# EAGLE board Roboduino TQFP-SMD (EAGLE 5.07)
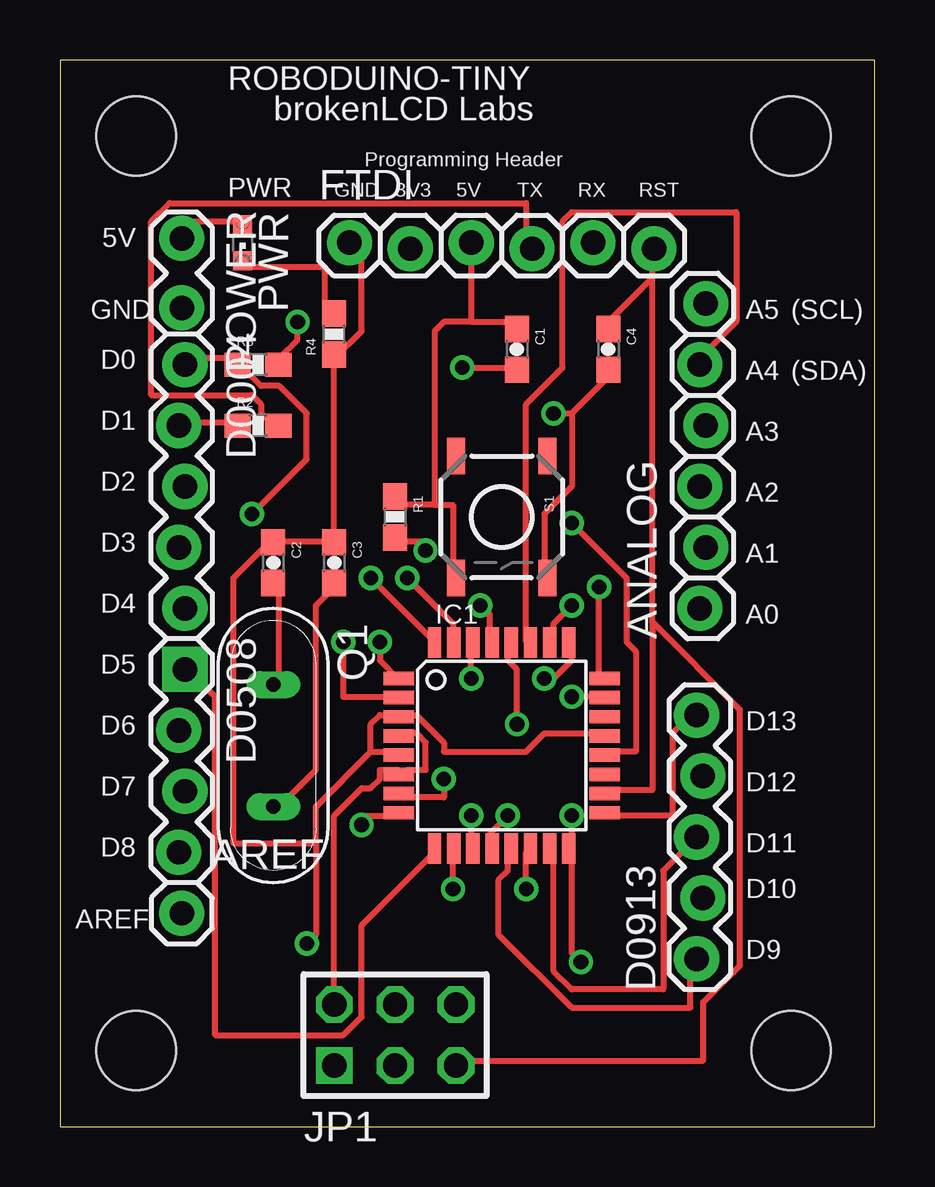
[diagram p0: board, top side]
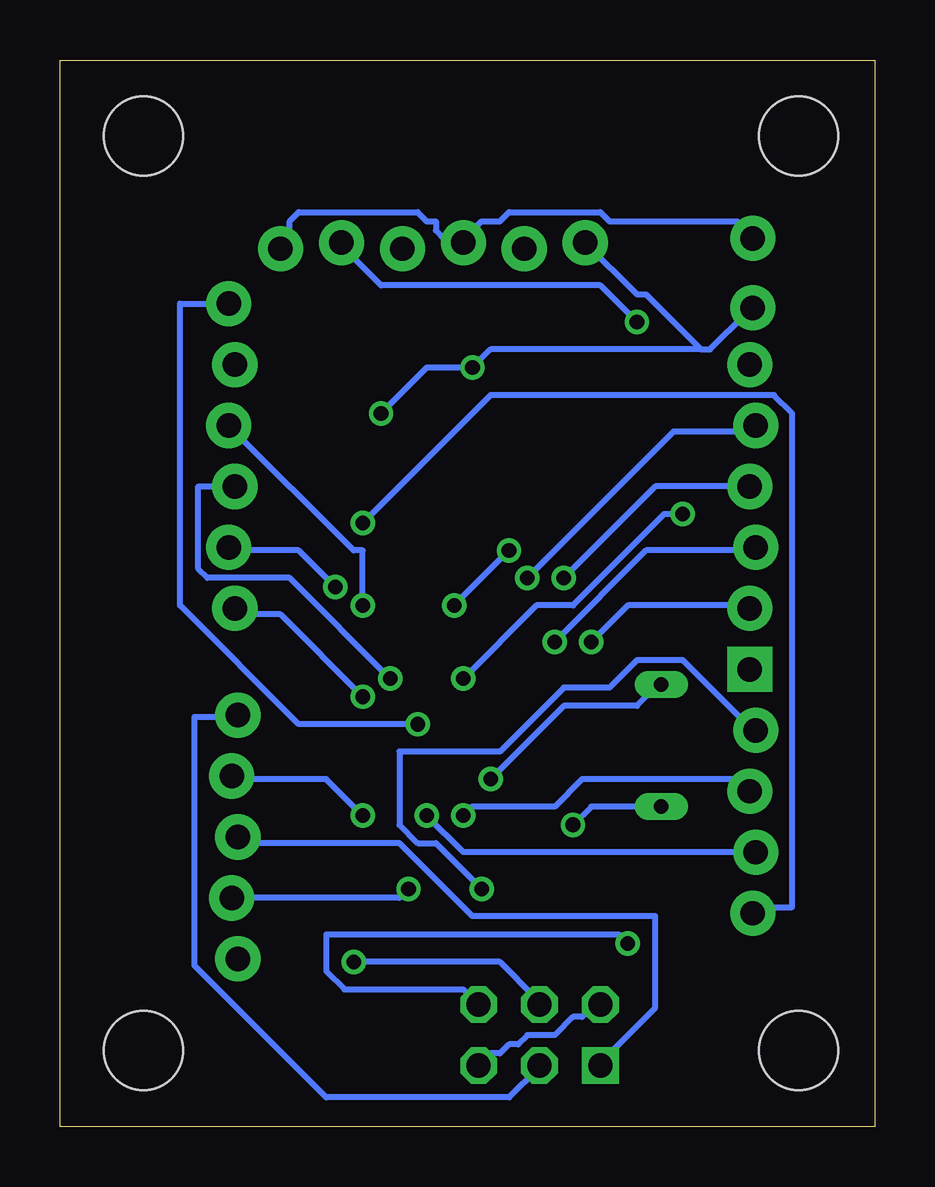
[diagram p1: board, bottom side, seen from below]

Size 33.96 x 44.44 mm. Coordinates in mm from the lower left corner, seen from the top.
Outline: 0,0 33.96,0 33.96,44.44 0,44.44 0,0
Copper layers (1*16): Top 0.035mm / dielectric 1.5mm / Bottom 0.035mm
Design rules "default": minimum track width 10mil, minimum drill 24mil, track to track 8mil, track to pad 8mil, pad to pad 8mil, via to via 8mil, smd to smd 8mil, copper to edge 40mil, drill to drill 8mil, minimum pad ring 10mil, minimum via ring 8mil, stop-mask expansion 4mil, vias tented up to drill 0mil, thermal gap 10mil

## Footprints (pad centres in the part's own frame; a part is rotated, then mirrored left to right if it is on the bottom)
1X06_LOCK = drill 1.016 pad 1.88 round: 1 0,0; 2 2.54,-0.254; 3 5.08,0; 4 7.62,-0.254; 5 10.16,0; 6 12.7,-0.254
1X01 = drill 1.016 pad 1.88 round: 1 0,0
0603-CAP = smd 1.1 x 1: 1 -0.85,0; 2 0.85,0
1X05_LOCK = drill 1.016 pad 1.88 round: 1 0,0.127; 2 2.54,-0.127; 3 5.08,0.127; 4 7.62,-0.127; 5 10.16,0.127
1X04_LOCK = drill 1.016 pad 1.88 square: 1 0,0.127 | drill 1.016 pad 1.88 round: 2 2.54,-0.127; 3 5.08,0.127; 4 7.62,-0.127
TQFP32-08 = smd 1.27 x 0.559: 1 -4.293,2.8; 2 -4.293,2; 3 -4.293,1.2; 4 -4.293,0.4; 5 -4.293,-0.4; 6 -4.293,-1.2; 7 -4.293,-2; 8 -4.293,-2.8; 17 4.293,-2.8; 18 4.293,-2; 19 4.293,-1.2; 20 4.293,-0.4; 21 4.293,0.4; 22 4.293,1.2; 23 4.293,2; 24 4.293,2.8 | smd 0.559 x 1.27: 9 -2.8,-4.293; 10 -2,-4.293; 11 -1.2,-4.293; 12 -0.4,-4.293; 13 0.4,-4.293; 14 1.2,-4.293; 15 2,-4.293; 16 2.8,-4.293; 25 2.8,4.293; 26 2,4.293; 27 1.2,4.293; 28 0.4,4.293; 29 -0.4,4.293; 30 -1.2,4.293; 31 -2,4.293; 32 -2.8,4.293
AVR-ISP-6 = drill 1.016 square: 1 -2.54,-1.27 | drill 1.016 octagon: 2 -2.54,1.27; 3 0,-1.27; 4 0,1.27; 5 2.54,-1.27; 6 2.54,1.27
1X02_LOCK = drill 1.016 pad 1.88 round: 1 -0.178,0; 2 2.718,0
CHIPLED_0603 = smd 0.8 x 0.8: A 0,-0.75; C 0,0.75
QS = drill 0.61 long: 1 -2.54,0; 2 2.54,0
0603-RES = smd 1.1 x 1: 1 -0.85,0; 2 0.85,0
TACTILE_SWITCH_SMD = smd 1.524 x 0.762: 1 -2.54,1.905; 2 2.54,1.905; 3 -2.54,-1.905; 4 2.54,-1.905
STANDOFF = hole 3.302: 0,0

## Placement (x,y rotation side)
ANALOG  [1X06_LOCK]  26.67,21.59 90 top
AREF  M01PTH  [1X01]  5.08,8.89 0 top
C1  100nF  [0603-CAP]  19.05,32.38 270 top
C2  22pF  [0603-CAP]  8.89,23.5 270 top
C3  22pF  [0603-CAP]  11.43,23.5 270 top
C4  100nF  [0603-CAP]  22.86,32.38 270 top
D0004  [1X05_LOCK]  5.08,31.75 270 top
D0508  [1X04_LOCK]  5.08,19.05 270 top
D0913  [1X05_LOCK]  26.67,6.99 90 top
FTDI  [1X06_LOCK]  12.06,36.83 0 top
IC1  MEGA8-AI  [TQFP32-08]  18.41,15.88 0 top
JP1  AVR-ISP-6  [AVR-ISP-6]  13.97,3.81 0 top
POWER  [1X02_LOCK]  5.08,36.83 270 top
PWR  [CHIPLED_0603]  7.62,36.83 180 top
Q1  16MHz  [QS]  8.89,15.88 270 top
R1  10K  [0603-RES]  13.97,25.4 270 top
R2  1K  [0603-RES]  8.26,29.21 0 top
R3  1K  [0603-RES]  8.26,31.75 0 top
R4  1K  [0603-RES]  11.43,33.02 90 top
S1  [TACTILE_SWITCH_SMD]  18.41,25.4 270 top
U$1  STANDOFF  [STANDOFF]  3.17,3.17 0 top
U$2  STANDOFF  [STANDOFF]  30.48,3.17 0 top
U$3  STANDOFF  [STANDOFF]  3.17,41.27 0 top
U$4  STANDOFF  [STANDOFF]  30.48,41.27 0 top

## Library data of the parts
ANALOG AREF C1-C4 D0004 D0508 D0913 FTDI POWER R1-R4 S1 = SparkFun
IC1 = atmel
JP1 = avr-6
PWR = led
Q1 = special
U$1-U$4 = brokenlcd

## Nets
GND: C1.2 C2.1 C3.1 C4.2 FTDI.1 IC1.3 IC1.5 IC1.21 JP1.6 POWER.2 R4.1 S1.2
N$1: IC1.29 R1.2
N$2: D0508.2 IC1.10
N$3: C2.2 IC1.7 Q1.1
N$4: C3.2 IC1.8 Q1.2
N$5: D0004.1 IC1.30 R3.1
N$6: D0004.2 IC1.31 R2.1
N$7: D0004.3 IC1.32
N$8: D0004.4 IC1.1
N$9: D0004.5 IC1.2
N$10: D0913.3 IC1.15 JP1.1
N$11: D0913.4 IC1.16 JP1.4
N$12: D0913.5 IC1.17 JP1.3
N$13: D0508.1 IC1.9
N$14: D0508.3 IC1.11
N$15: D0508.4 IC1.12
N$16: D0913.1 IC1.13
N$17: D0913.2 IC1.14
N$18: AREF.1 IC1.20
N$19: ANALOG.1 IC1.23
N$20: ANALOG.2 IC1.24
N$21: ANALOG.3 IC1.25
N$22: ANALOG.4 IC1.26
N$23: ANALOG.5 IC1.27
N$24: ANALOG.6 IC1.28
N$25: PWR.C R4.2
N$26: FTDI.4 R2.2
N$27: FTDI.5 R3.2
VCC: C1.1 C4.1 FTDI.3 FTDI.6 IC1.4 IC1.6 IC1.18 JP1.2 JP1.5 POWER.1 PWR.A R1.1 S1.4

## Tracks (layer width: path | path; a pad name or v marks a point on that pad's centre or on a via)
GND  (via drill 0.61)
  Top 0.254: 12.95,15.62 14.1,15.62 IC1.5 | 12.95,15.62 12.95,16.76 13.34,17.14 14.1,17.14 IC1.3 14.48,17.14 14.86,17.14 16,16 16,15.62 19.43,15.62 20.19,16.38 22.48,16.38 IC1.21 | v10.29,7.62 10.67,8 10.67,11.81 | 10.67,11.81 10.67,13.34 12.95,15.62 | 11.43,24.38 9.14,24.38 C2.1 8.76,24.38 7.24,22.86 7.24,11.81 10.67,11.81 | 11.43,24.38 11.43,32 | 11.43,24.38 C3.1 | 11.43,32 12.57,33.15 12.57,36.2 12.19,36.58 FTDI.1 | 11.43,32 R4.1 | 21.34,29.72 22.86,31.24 C4.2 | 21.34,29.72 21.34,26.67 20.19,25.53 20.19,22.86 S1.2 | v16.76,31.62 19.05,31.62 C1.2 | v20.57,29.72 21.34,29.72
  Bottom 0.254: v10.29,7.62 10.67,8 22.86,8 22.86,6.48 22.1,5.71 17.14,5.71 JP1.6 | 7.24,32.38 6.86,32.38 5.33,33.91 POWER.2 | 7.24,32.38 16,32.38 v16.76,31.62 18.67,31.62 v20.57,29.72 | 7.24,32.38 9.53,34.67 9.91,34.67 FTDI.1
N$1  (via drill 0.61)
  Top 0.254: v15.24,24 15.24,24.38 14.1,24.38 R1.2 | v17.53,21.72 17.91,21.34 17.91,20.19 IC1.29
  Bottom 0.254: v15.24,24 v17.53,21.72
N$2  (via drill 0.61)
  Top 0.254: v16.38,9.91 16.38,11.43 IC1.10
  Bottom 0.254: v16.38,9.91 18.29,11.81 19.05,11.81 19.81,12.57 19.81,15.62 15.62,15.62 12.95,18.29 11.05,18.29 9.91,19.43 8,19.43 5.33,16.76 4.95,16.76 D0508.2
N$3  (via drill 0.61)
  Top 0.254: C2.2 9.14,22.48 9.14,18.67 Q1.1 | v16,14.48 16,13.72 14.48,13.72 IC1.7
  Bottom 0.254: v16,14.48 12.95,17.53 9.91,17.53 9.14,18.29 Q1.1
N$4  (via drill 0.61)
  Top 0.254: C3.2 11.43,22.48 10.67,21.72 10.67,14.86 9.14,13.34 Q1.2 | v12.57,12.57 12.57,12.95 14.1,12.95 IC1.8
  Bottom 0.254: v12.57,12.57 11.81,13.34 Q1.2
N$5  (via drill 0.61)
  Top 0.254: D0004.1 5.33,32 7.24,32 R3.1 7.62,31.62 8.38,30.86 9.14,30.86 10.29,29.72 10.29,27.81 v8,25.53 | v17.14,18.67 17.14,19.81 IC1.30
  Bottom 0.254: v17.14,18.67 14.1,21.72 12.57,21.72 8.76,25.53 v8,25.53
N$6  (via drill 0.61)
  Top 0.254: R2.1 7.24,29.34 4.95,29.34 D0004.2 | v14.48,22.86 16.38,20.95 16.38,20.19 IC1.31
  Bottom 0.254: v14.48,22.86 8.38,28.96 4.95,28.96 D0004.2
N$7  (via drill 0.61)
  Top 0.254: v12.95,22.86 15.62,20.19 IC1.32
  Bottom 0.254: v12.95,22.86 9.14,26.67 D0004.3
N$8  (via drill 0.61)
  Top 0.254: v13.34,20.19 13.34,19.43 14.1,18.67 IC1.1
  Bottom 0.254: v13.34,20.19 9.53,24 4.95,24 D0004.4
N$9  (via drill 0.61)
  Top 0.254: v11.81,20.19 11.81,17.91 14.1,17.91 IC1.2
  Bottom 0.254: v11.81,20.19 10.29,21.72 5.33,21.72 D0004.5
N$10
  Top 0.254: IC1.15 20.57,11.43 20.57,6.48 21.34,5.71 25.15,5.71 25.15,10.67 D0913.3
  Bottom 0.254: JP1.1 11.43,2.67 9.14,4.95 9.14,8.76 16.76,8.76 19.81,11.81 26.29,11.81 D0913.3
N$11  (via drill 0.61)
  Top 0.254: v21.34,12.95 21.34,11.81 IC1.16 21.34,11.43 21.34,7.24 v21.72,6.86
  Bottom 0.254: v21.34,12.95 22.86,14.48 26.67,14.48 D0913.4 | v21.72,6.86 15.62,6.86 14.1,5.33 JP1.4
N$12
  Top 0.254: IC1.17 22.86,12.95 25.53,12.95 25.53,16.38 26.29,17.14 D0913.5
  Bottom 0.254: JP1.3 14.02,2.44 15.24,1.22 22.86,1.22 28.35,6.71 28.35,17.07 26.82,17.07 D0913.5
N$13
  Top 0.254: IC1.9 15.62,11.43 12.57,8.38 12.57,4.57 11.81,3.81 6.48,3.81 6.48,17.91 5.33,19.05 D0508.1
N$14  (via drill 0.61)
  Top 0.254: v17.14,12.95 17.14,11.81 IC1.11
  Bottom 0.254: v17.14,12.95 16.76,13.34 13.34,13.34 12.19,14.48 5.71,14.48 D0508.3
N$15  (via drill 0.61)
  Top 0.254: v18.67,12.95 17.91,12.19 17.91,11.81 IC1.12
  Bottom 0.254: v18.67,12.95 17.14,11.43 D0508.4
N$16
  Top 0.254: IC1.13 18.67,11.43 18.67,10.67 18.29,10.29 18.29,8 21.34,4.95 26.29,4.95 26.29,6.86 D0913.1
N$17  (via drill 0.61)
  Top 0.254: v19.43,9.91 19.43,11.43 IC1.14
  Bottom 0.254: v19.43,9.91 19.81,9.53 D0913.2
N$18  (via drill 0.61)
  Top 0.254: v21.34,25.15 23.62,22.86 23.62,20.19 24,19.81 24,15.62 22.86,15.62 IC1.20
  Bottom 0.254: v21.34,25.15 16,30.48 4.19,30.48 3.43,29.72 3.43,9.14 4.95,9.14 AREF.1
N$19  (via drill 0.61)
  Top 0.254: v21.34,17.91 22.48,17.91 IC1.23
  Bottom 0.254: v21.34,17.91 24.77,21.34 26.67,21.34 ANALOG.1
N$20  (via drill 0.61)
  Top 0.254: v22.48,22.48 22.48,18.67 IC1.24
  Bottom 0.254: v22.48,22.48 24,24 26.67,24 ANALOG.2
N$21  (via drill 0.61)
  Top 0.254: v20.19,18.67 20.57,18.67 21.34,19.43 21.34,19.81 IC1.25
  Bottom 0.254: v20.19,18.67 24.38,22.86 27.81,22.86 28.19,23.24 28.19,26.67 ANALOG.3
N$22  (via drill 0.61)
  Top 0.254: v21.34,21.72 20.57,20.95 20.57,20.19 IC1.26
  Bottom 0.254: v21.34,21.72 21.34,24 21.72,24 ANALOG.4
N$23
  Top 0.254: IC1.27 19.43,20.19 19.43,30.1 20.95,31.62 20.95,37.72 21.34,38.1 28.19,38.1 28.19,33.53 26.67,32 ANALOG.5
N$24  (via drill 0.61)
  Top 0.254: v19.05,16.76 19.05,19.05 18.67,19.43 18.67,19.81 IC1.28
  Bottom 0.254: v19.05,16.76 24,16.76 28.96,21.72 28.96,34.29 ANALOG.6
N$25
  Top 0.254: PWR.C 7.62,35.81 11.05,35.81 11.05,34.29 11.43,33.91 R4.2
N$26
  Top 0.254: R2.2 8.76,29.34 8.38,29.72 8.38,30.1 8,30.48 3.81,30.48 3.81,37.72 4.57,38.48 19.43,38.48 19.43,36.58 FTDI.4
N$27  (via drill 0.61)
  Top 0.254: v9.91,33.53 9.91,32.77 9.14,32 R3.2
  Bottom 0.254: v9.91,33.53 11.43,35.05 20.57,35.05 22.1,36.58 FTDI.5
VCC
  Top 0.254: PWR.A 7.62,37.72 4.95,37.72 4.95,37.34 POWER.1 | 15.62,25.91 16.38,25.91 16.38,22.86 S1.4 | 15.62,25.91 14.1,25.91 R1.1 | 17.14,33.53 19.05,33.53 C1.1 | FTDI.3 17.14,33.53 | 15.62,25.91 15.62,33.15 16,33.53 17.14,33.53 | IC1.4 14.48,16.38 14.86,16.38 15.24,16 15.24,14.86 14.48,14.86 IC1.6 14.1,14.86 13.34,14.86 13.34,14.48 12.95,14.1 12.57,14.1 11.43,12.95 JP1.2 | 24.69,35.36 22.86,33.53 C4.1 | 24.69,35.36 24.69,36.58 FTDI.6 | 24.69,21.03 24.69,35.36 | 24.69,21.03 24.69,14.02 22.86,14.02 IC1.18 | 24.69,21.03 28.35,17.37 28.35,6.71 26.82,5.18 26.82,2.74 16.76,2.74 JP1.5
  Bottom 0.254: 17.14,36.96 16.76,36.96 16.76,37.34 16.38,37.72 15.62,37.72 15.24,38.1 11.43,38.1 11.05,37.72 5.71,37.72 5.33,37.34 POWER.1 | JP1.5 16,3.05 15.62,3.05 15.24,3.43 14.86,3.43 14.48,3.81 13.34,3.81 12.57,4.57 12.19,4.57 11.81,4.95 11.43,4.95 JP1.2 | 17.14,36.96 17.91,36.96 18.29,37.34 18.29,37.72 18.67,37.72 19.05,38.1 24,38.1 24.38,37.72 24.38,36.58 FTDI.6 | 17.14,36.96 FTDI.3

## Text on the board
tPlace: ROBODUINO-TINY | brokenLCD Labs | Programming Header | PWR | GND | 3V3 | 5V | TX | RX | RST | 5V | GND | A5 | (SCL) | D0 | A4 | (SDA) | D1 | A3 | D2 | A2 | D3 | A1 | D4 | A0 | D5 | D6 | D13 | D7 | D12 | D8 | D11 | D10 | AREF | D9